# EAGLE board Power_Distribution_Board (EAGLE 5.11)
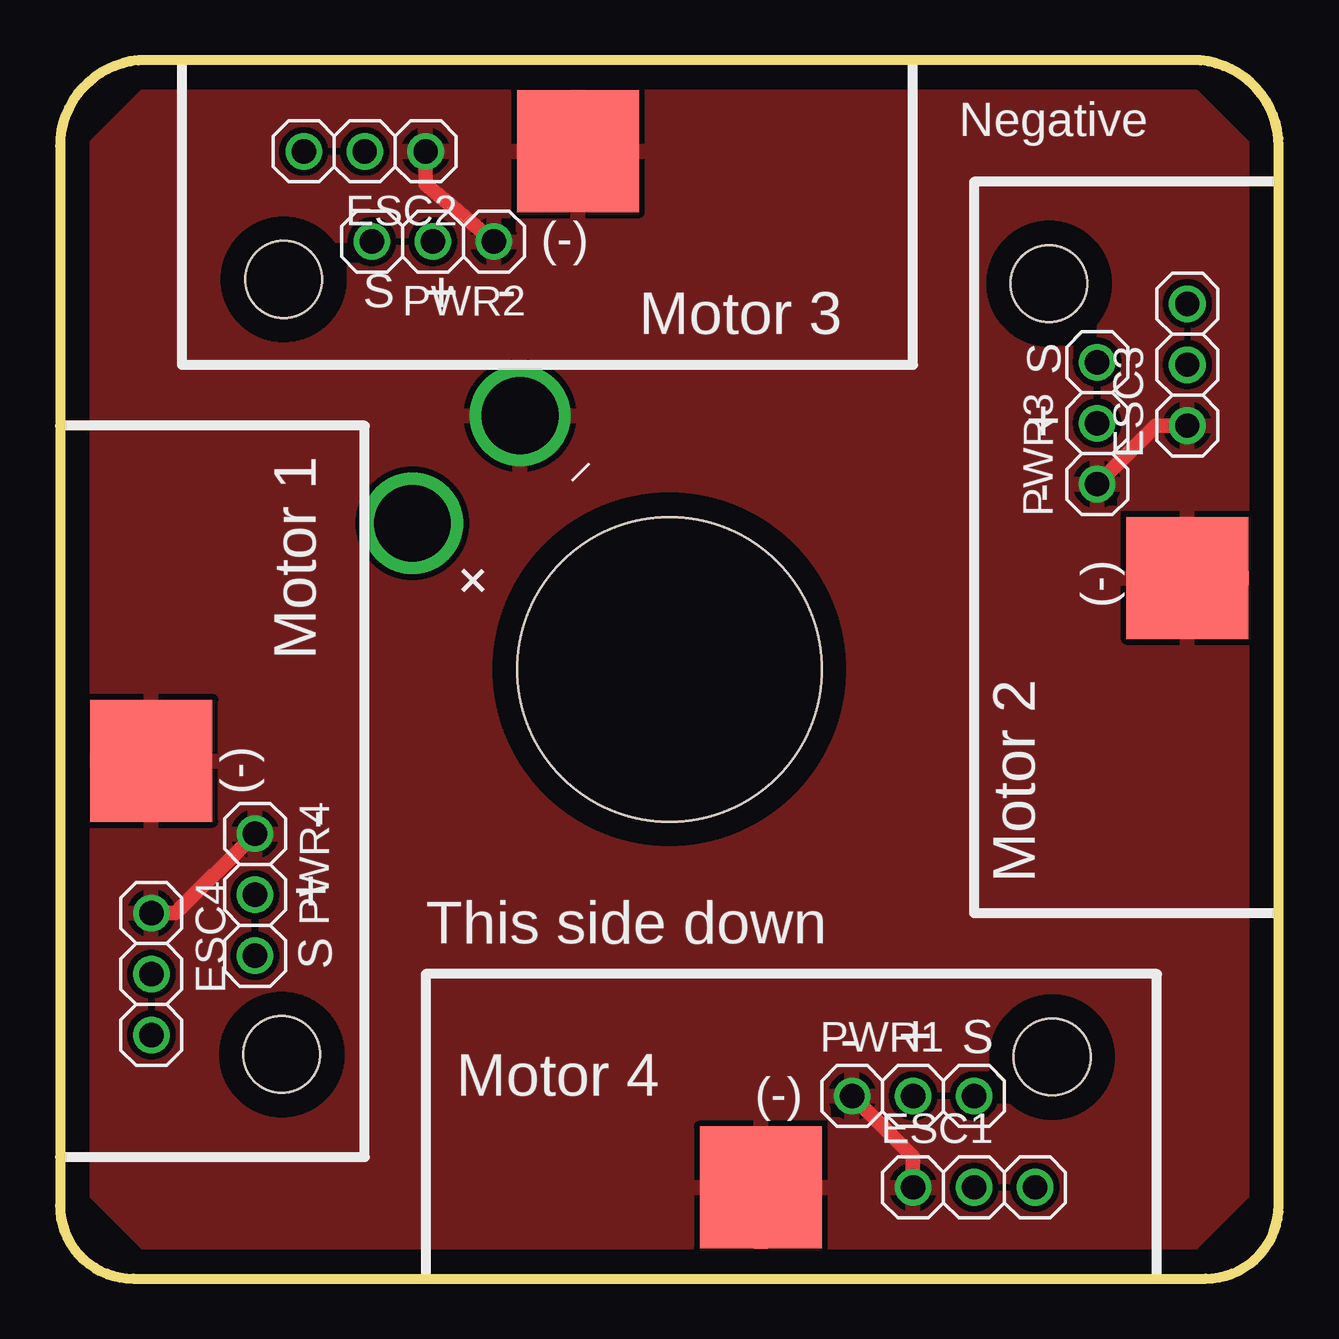
[diagram p0: board, top side]
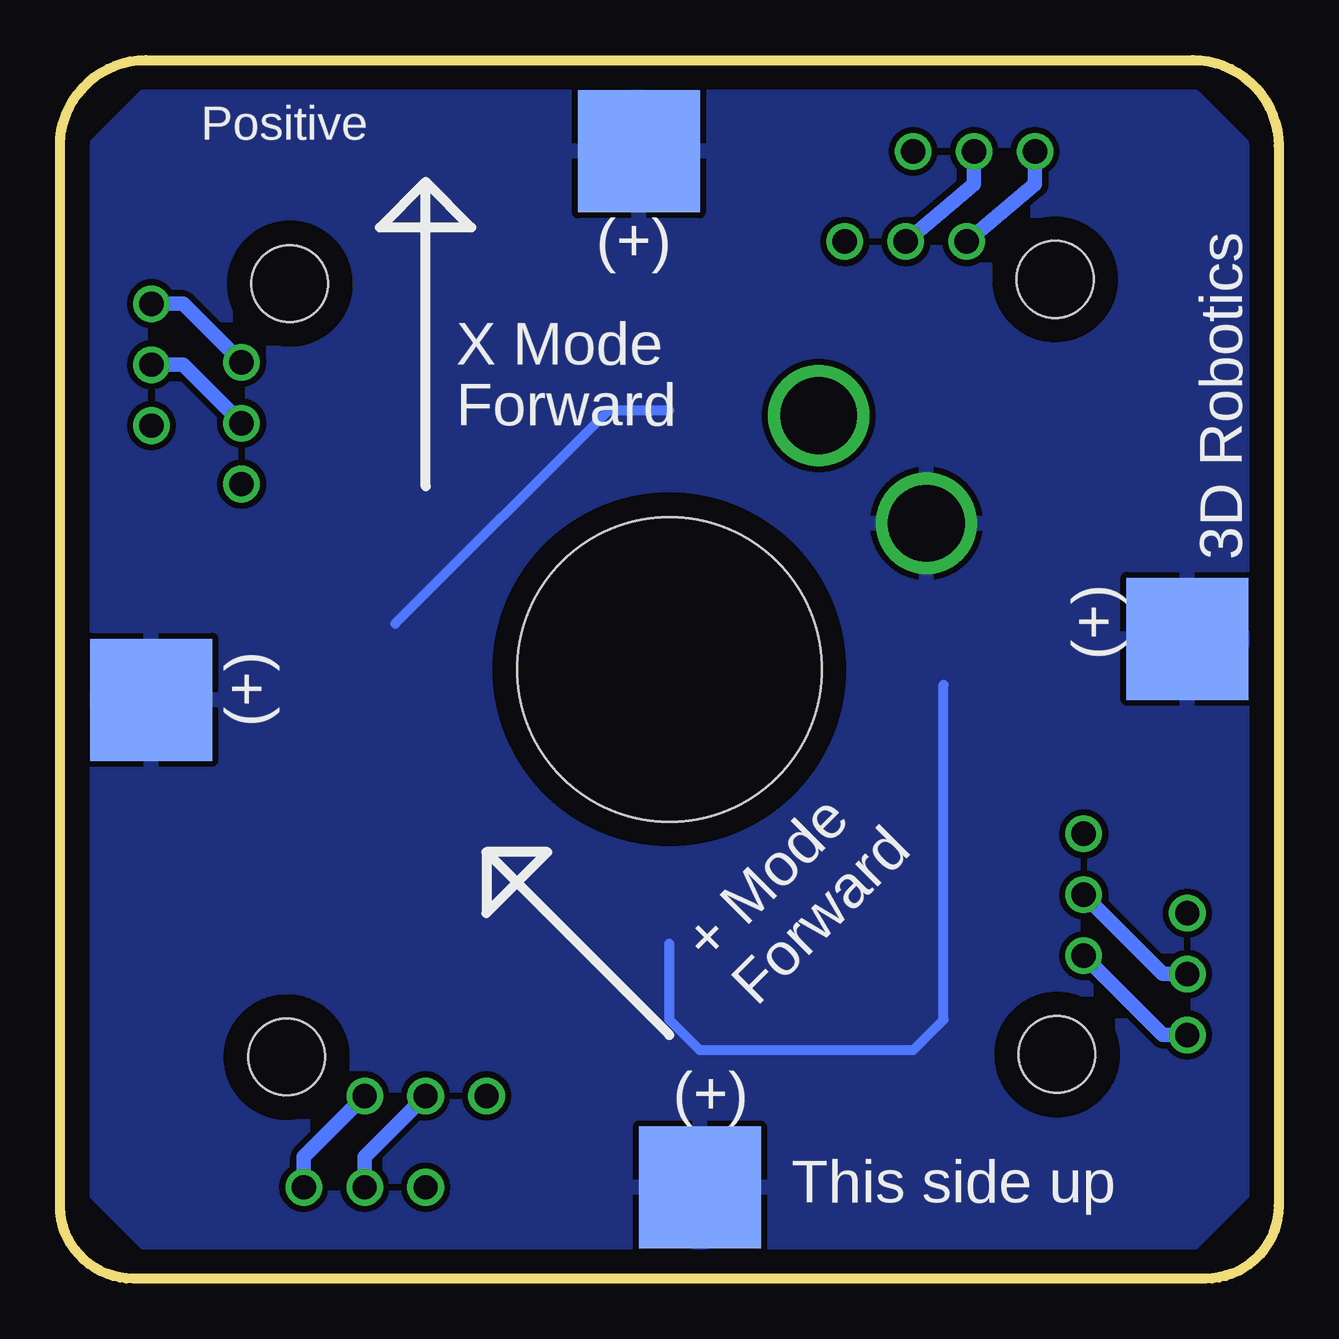
[diagram p1: board, bottom side, seen from below]

Size 50.8 x 50.8 mm. Coordinates in mm from the lower left corner, seen from the top.
Outline: 3.59,50.8 arc90 0,47.21 0,3.06 arc90 3.06,0 47.74,0 arc90 50.8,3.06 50.8,47.21 arc90 47.21,50.8 3.59,50.8
Copper layers (1*16): Top 0.035mm / dielectric 1.5mm / Bottom 0.035mm
Design rules "default": minimum track width 10mil, minimum drill 24mil, track to track 8mil, track to pad 8mil, pad to pad 8mil, via to via 8mil, smd to smd 8mil, copper to edge 40mil, drill to drill 8mil, minimum pad ring 10mil, minimum via ring 8mil, stop-mask expansion 4mil, vias tented up to drill 0mil, thermal gap 10mil
Holes 12.7 mm at 25.4,25.4
Holes 3.2 mm at 9.32,41.66 9.25,9.35 41.35,9.25 41.22,41.48

## Footprints (pad centres in the part's own frame; a part is rotated, then mirrored left to right if it is on the bottom)
DEANPAD_BSTOP = smd 5.08 x 5.08 bottom: P$1 0,0
1X03 = drill 1.016 round: 1 -2.54,0; 2 0,0; 3 2.54,0
PDB_PWR/GND = drill 3.2 round: NEG 2.54,2.54; POS -3.81,2.54
DEANPAD = smd 5.08 x 5.08: PAD 0,0

## Placement (x,y rotation side)
BAT  DEANPAD_BSTOP  [DEANPAD_BSTOP]  3.81,26.67 0 top
ESC1  [1X03]  38.1,3.81 0 top
ESC2  [1X03]  12.7,46.99 180 top
ESC3  [1X03]  46.99,38.1 90 top
ESC4  [1X03]  3.81,12.7 270 top
JP1  PDB_PWR/GND  [PDB_PWR/GND]  19.18,32.38 45 top
PWR1  [1X03]  35.56,7.62 0 top
PWR2  [1X03]  15.54,43.23 180 top
PWR3  [1X03]  43.23,35.66 90 top
PWR4  [1X03]  8.13,16 270 top
U$1  DEANPAD  [DEANPAD]  29.21,3.81 0 top
U$2  DEANPAD  [DEANPAD]  3.81,21.59 0 top
U$3  DEANPAD  [DEANPAD]  21.59,46.99 0 top
U$4  DEANPAD  [DEANPAD]  46.99,29.21 0 top
U$5  DEANPAD_BSTOP  [DEANPAD_BSTOP]  24.13,3.81 0 top
U$7  DEANPAD_BSTOP  [DEANPAD_BSTOP]  46.99,24.13 0 top
U$8  DEANPAD_BSTOP  [DEANPAD_BSTOP]  26.67,46.99 0 top

## Library data of the parts
BAT JP1 U$1-U$5 U$7 U$8 = alansanchez
ESC1-ESC4 PWR1-PWR4 = adafruit

## Nets
BAT: BAT.P$1 JP1.POS U$5.P$1 U$7.P$1 U$8.P$1
NEG: ESC1.1 ESC2.1 ESC3.1 ESC4.1 JP1.NEG PWR1.1 PWR2.1 PWR3.1 PWR4.1 U$1.PAD U$2.PAD U$3.PAD U$4.PAD
P1: ESC1.2 PWR1.2
P2: ESC2.2 PWR2.2
P3: ESC3.2 PWR3.2
P4: ESC4.2 PWR4.2
S1: ESC1.3 PWR1.3
S2: ESC2.3 PWR2.3
S3: ESC3.3 PWR3.3
S4: ESC4.3 PWR4.3

## Tracks (layer width: path | path; a pad name or v marks a point on that pad's centre or on a via)
BAT
  Bottom 0.406: 36.83,27.3 27.94,36.2 25.4,36.2 | 13.97,24.77 13.97,10.79 15.24,9.53 24.13,9.53 25.4,10.79 25.4,13.97
  pour Bottom (isolate 0.254): 1.27,46.99 1.27,3.81 3.81,1.27 46.99,1.27 49.53,3.81 49.53,46.99 46.99,49.53 3.81,49.53
NEG
  Top 0.61: ESC1.1 35.56,5.08 PWR1.1 | ESC3.1 45.67,35.56 PWR3.1 | ESC2.1 15.24,45.62 PWR2.1 | ESC4.1 4.83,15.24 PWR4.1
  pour Top (isolate 0.254): 1.27,3.81 3.81,1.27 46.99,1.27 49.53,3.81 49.53,46.99 46.99,49.53 3.81,49.53 1.27,46.99
P1
  Bottom 0.61: ESC1.2 38.1,5.08 PWR1.2
P2
  Bottom 0.61: ESC2.2 12.7,45.62 PWR2.2
P3
  Bottom 0.61: ESC3.2 45.67,38.1 PWR3.2
P4
  Bottom 0.61: ESC4.2 4.83,12.7 PWR4.2
S1
  Bottom 0.61: ESC1.3 40.64,5.08 PWR1.3
S2
  Bottom 0.61: ESC2.3 10.16,45.62 PWR2.3
S3
  Bottom 0.61: ESC3.3 45.67,40.64 PWR3.3
S4
  Bottom 0.61: ESC4.3 4.83,10.16 PWR4.3

## Text on the board
tPlace: Negative | (-) | S | + | - | Motor 3 | S | + | Motor 1 | - | (-) | (-) | - | + | Motor 2 | S | This side down | - | + | S | Motor 4 | (-)
bPlace: Positive | (+) | X Mode | Forward | 3D Robotics | (+) | (+) | + Mode | Forward | (+) | This side up